# Altium PCB PCB1.PcbDoc
Units mm, origin at the board's own origin, x right, y up, seen from the top; angles counter-clockwise.
Board outline 82 x 65 mm, 2 copper layers (Top Layer, Bottom Layer); 67 components, 69 nets, 262 pads, 85 vias.
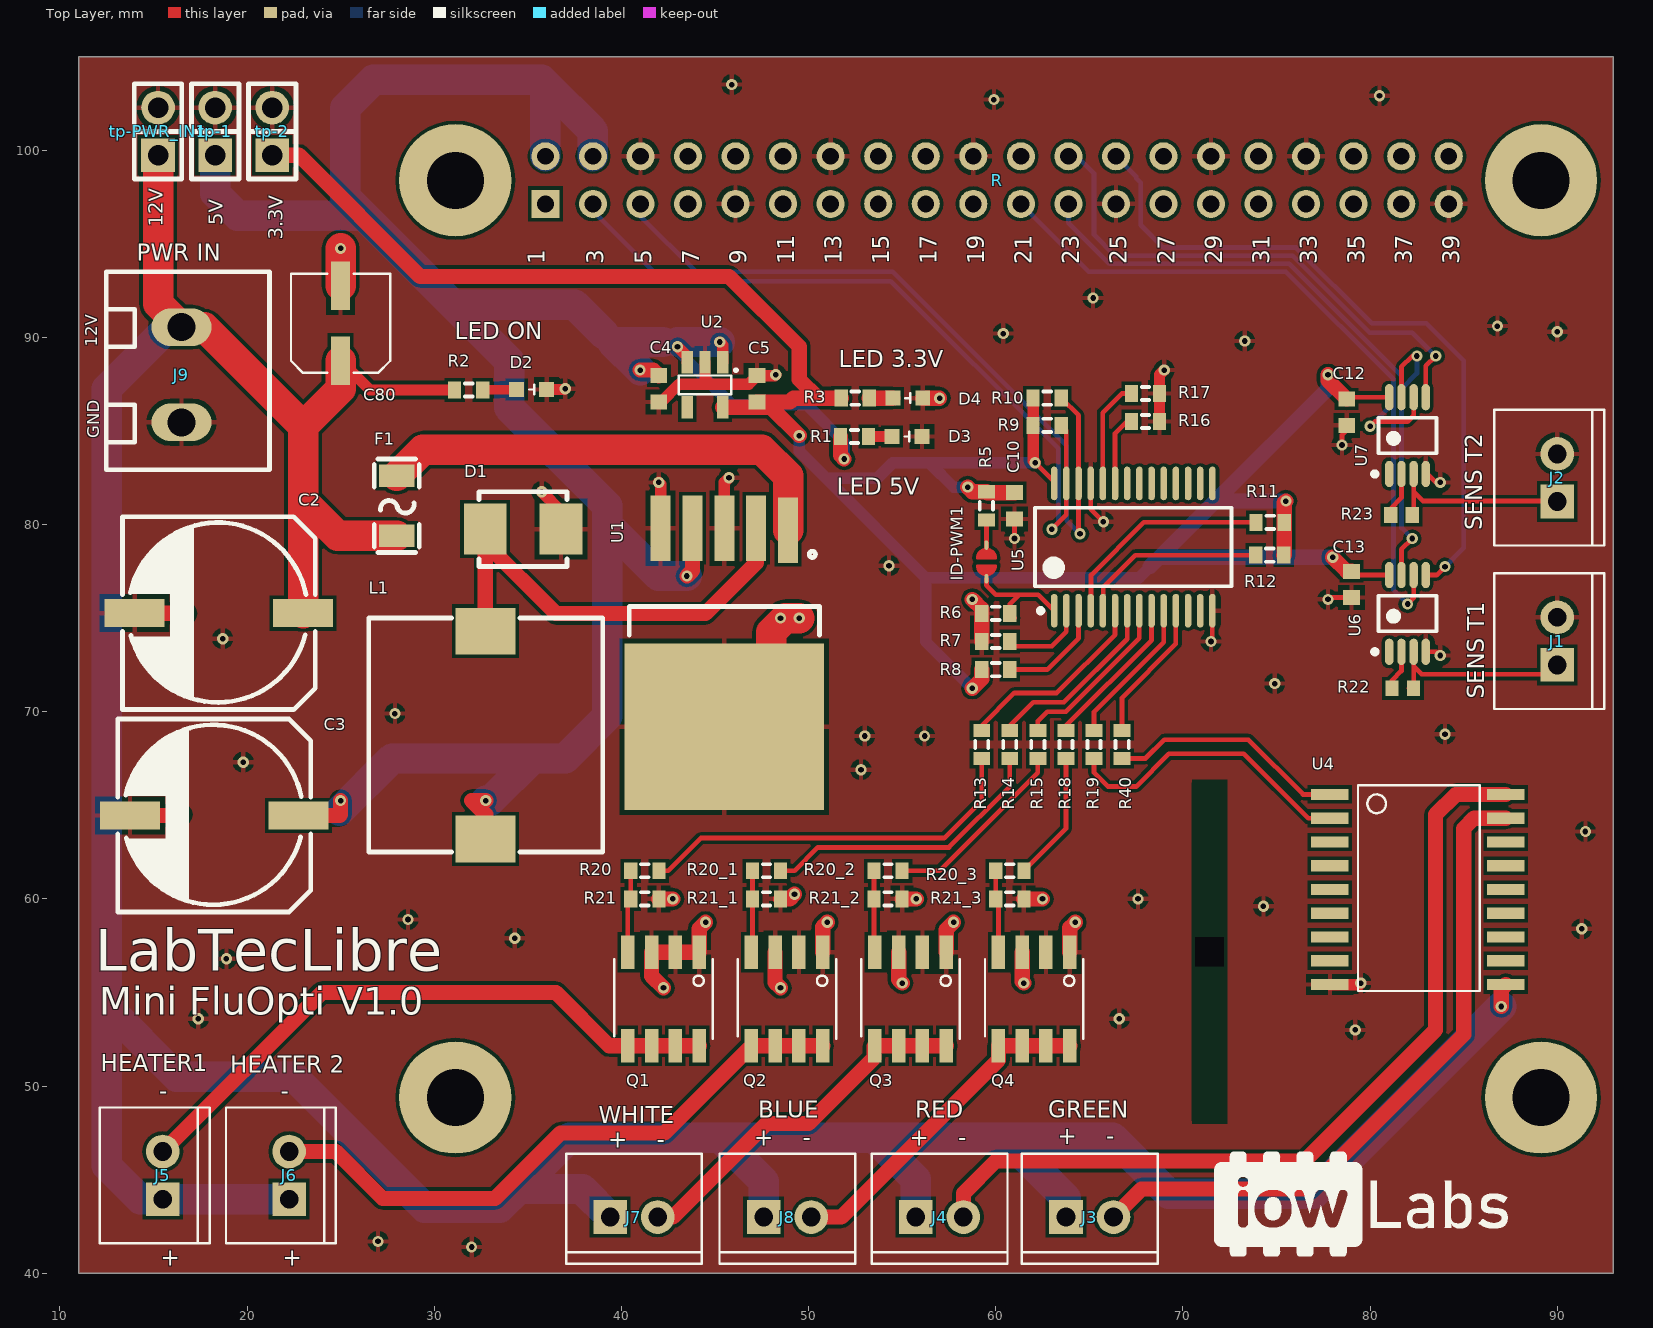
[diagram p0: Top Layer view]
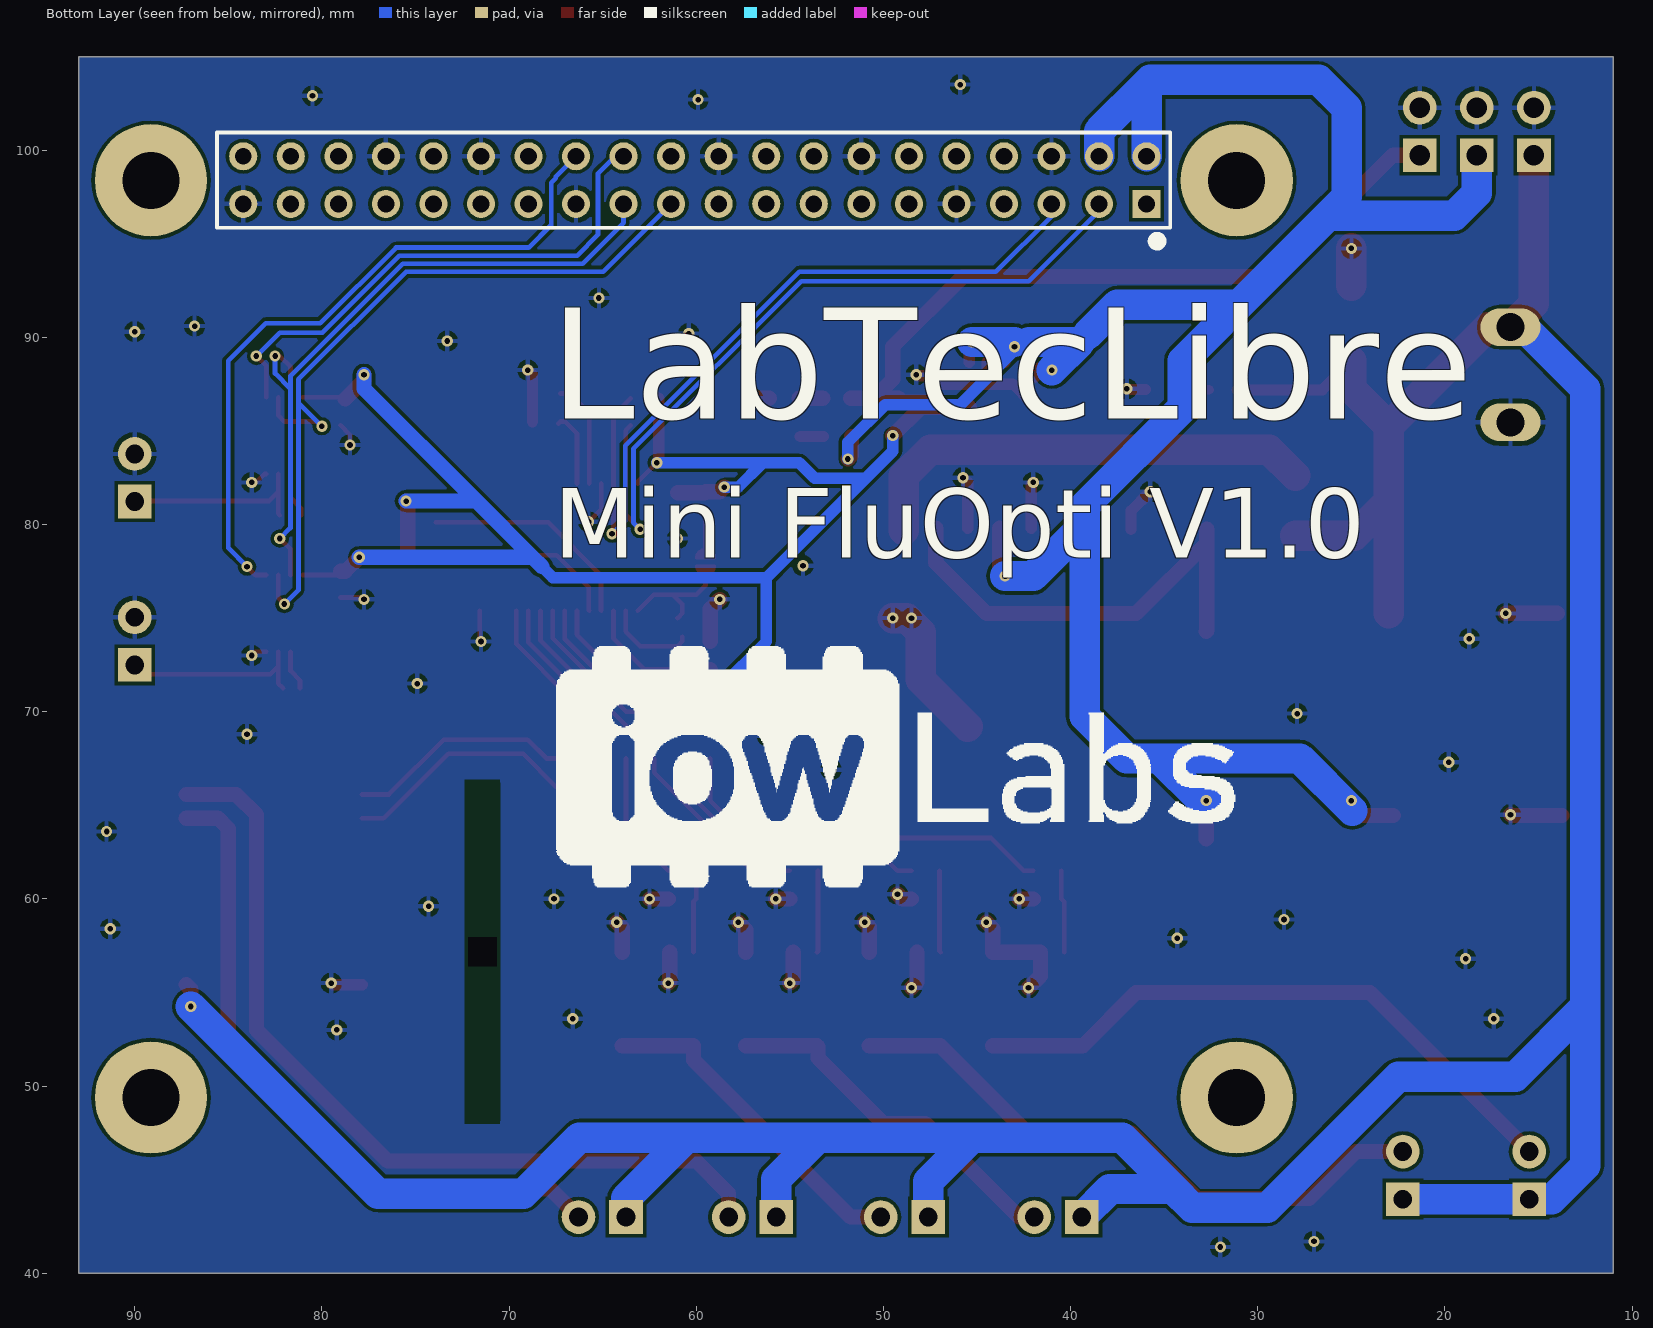
[diagram p1: Bottom Layer view, seen from below]

## Layer stack, top to bottom
Top Solder: solder mask 0.0102, Solder Resist, Dk 3.5
Top Layer: signal copper 0.0356
Dielectric 1: dielectric 0.32, FR-4, Dk 4.8
Bottom Layer: signal copper 0.0356
Bottom Solder: solder mask 0.0102, Solder Resist, Dk 3.5

## Board outline
11,40 93,40 93,105 11,105

## Design rules (kind name [scope] priority, off if disabled: settings)
Clearance [All] p1: gap=0.178 ignorepadtopadclearanceinfootprint=FALSE
PolygonConnect [All] p1: connectstyle=Relief reliefconductorwidth=0.254 reliefentries=4 polygonreliefangle="90 Angle" airgapwidth=0.254
RoutingVias [All] p1: holewidth=0.3 width=0.6 viastyle="Through Hole" minholewidth=0.3 minwidth=0.6 maxholewidth=0.3 maxwidth=0.6
SolderMaskExpansion [All] p1: expansion=0.102
Width [All] p1: maxlimit=1.626 minlimit=0.254 preferedwidth=0.61
30 further rules are at their usual default settings.

## Classes and differential pairs
component class ADC: C12 C13 J1 J2 R22 R23 T2 U6 U7
component class U_DCDC_stepdown: C2 C3 C4 C5 D1 D2 D3 D4 F1 L1 R1 R2 R3 tp-1 tp-2 U1 U2
component class Salidas: J3 J4 J5 J6 J7 J8
component class "Generador PWM": 5 C10 ID-PWM1 R5 R6 R7 R8 R9 R10 R11 R12 R13 R14 R15 R16 R17 R18 R19 R40 U5
component class Drivers: Q1 Q2 Q3 Q4 R20 R20_1 R20_2 R20_3 R21 R21_1 R21_2 R21_3 U4
component class U_Rasp: R
component class TopLevel: C80 J9 tp-PWR_IN1

## Components (designator, comment, footprint, x,y, rotation, side; value= is the part's Value field where it differs from the comment)
C2 "Cap pol" CAP_SMD_Electrolytic_10x10 18.5,75.262 r180 top value=680uF
C3 "Cap pol" CAP_SMD_Electrolytic_10x10 18.25,64.453 r180 top value=330uF
C4 "Cap Semi" 1608[0603] 42,87.25 r90 top value=1uF
C5 "Cap Semi" 1608[0603] 47.25,87.25 r270 top value=1uF
C10 "Cap Semi" 1608[0603] 61,81 r90 top value=10uF
C12 "Cap Semi" 1608[0603] 78.75,86 r90 top value=100nF
C13 "Cap Semi" 1608[0603] 79,76.8 r90 top value=100nF
C80 "Cap pol" CAP_SMD_Electrolytic_5X5.4 25,90.75 r90 top value=47uF
D1 "Schottky Diode" SMB_L4.6-W3.6-LS5.3-RD 34.75,79.75 r180 top
D2 "Generic LED" LED0603 35.21,87.211 r0 top
D3 "Generic LED" LED0603 55.256,84.7 r0 top
D4 "Generic LED" LED0603 55.3,86.75 r0 top
F1 "Generic Fuse" F1206 28,81 r90 top
ID-PWM1 "sj" SJ2 59.5,78 r270 top
J1 "Generic header 2x1" JST-2x1 90,73.77 r90 top
J2 "Generic header 2x1" JST-2x1 90,82.5 r90 top
J3 "Generic header 2x1" JST-2x1 65.02,43 r0 top
J4 "Generic header 2x1" JST-2x1 57,43 r0 top
J5 "Generic header 2x1" JST-2x1 15.5,45.23 r90 top
J6 "Generic header 2x1" JST-2x1 22.25,45.23 r90 top
J7 "Generic header 2x1" JST-2x1 40.67,43 r0 top
J8 "Generic header 2x1" JST-2x1 48.87,43 r0 top
J9 "Tblock 2x1" T_BLOCK_2P 16.5,88 r270 top
L1 "Inductor" IND-SMD_L12.5-W12.5_SMDRS1275 32.75,68.75 r270 top value=33uH
Q1 "IRF7401PbF-1" SOIC8 42.25,54.65 r180 top
Q2 "IRF7401PbF-1" SOIC8 48.849,54.65 r180 top
Q3 "IRF7401PbF-1" SOIC8 55.449,54.65 r180 top
Q4 "IRF7401PbF-1" SOIC8 62.048,54.65 r180 top
R "RPI GPIO Connector" rpi 60.071,98.4 r180 top
R1 "Res3" J1-0603 52.45,84.7 r180 top value=220
R2 "Res3" J1-0603 31.844,87.186 r180 top value=442
R3 "Res3" J1-0603 52.494,86.75 r180 top value=150
R5 "Res3" J1-0603 59.5,81 r270 top value=2K
R6 "Res3" J1-0603 60,75.25 r0 top value=10K
R7 "Res3" J1-0603 60,73.75 r0 top value=10K
R8 "Res3" J1-0603 60,72.25 r0 top value=2K
R9 "Res3" J1-0603 62.75,85.296 r0 top value=2K
R10 "Res3" J1-0603 62.75,86.75 r0 top value=2K
R11 "Res3" J1-0603 74.663,80.115 r180 top value=2K
R12 "Res3" J1-0603 74.637,78.363 r180 top value=2K
R13 "Res3" J1-0603 59.25,68.25 r90 top value=220
R14 "Res3" J1-0603 60.75,68.25 r90 top value=220
R15 "Res3" J1-0603 62.25,68.25 r90 top value=220
R16 "Res3" J1-0603 68,85.5 r180 top value=10K
R17 "Res3" J1-0603 68,87 r180 top value=10K
R18 "Res3" J1-0603 63.75,68.25 r90 top value=220
R19 "Res3" J1-0603 65.25,68.25 r90 top value=220
R20 "Res3" J1-0603 41.25,61.5 r180 top value=110
R20_1 "Res3" J1-0603 47.75,61.5 r180 top value=110
R20_2 "Res3" J1-0603 54.25,61.5 r180 top value=110
R20_3 "Res3" J1-0603 60.75,61.5 r180 top value=110
R21 "Res3" J1-0603 41.25,60 r180 top value=10K
R21_1 "Res3" J1-0603 47.75,60 r180 top value=10K
R21_2 "Res3" J1-0603 54.25,60 r180 top value=10K
R21_3 "Res3" J1-0603 60.75,60 r180 top value=10K
R22 "CRCW06033K74FKEA" RESC1609X50X30LL10T20 81.75,71.25 r180 top value=4.22k
R23 "CRCW06033K74FKEA" RESC1609X50X30LL10T20 81.675,80.5 r180 top value=4.22k
R40 "Res3" J1-0603 66.75,68.25 r90 top value=220
tp-1 "Pin Header 2x1" HDR-TH_P2.54-H-M_A2541WV-2P 18.298,101 r90 top
tp-2 "Pin Header 2x1" HDR-TH_P2.54-H-M_A2541WV-2P 21.347,101 r90 top
tp-PWR_IN1 "Pin Header 2x1" HDR-TH_P2.54-H-M_A2541WV-2P 15.25,101 r90 top
U1 "LM2596-5V" TO-263-5 45.5,74.5 r90 top
U2 "AP2112K-3.3TRG1" SOT25-5 44.469,87.461 r0 top
U4 "ULN2803A" SOIC18 77.85,65.58 r0 top
U5 "PCA9685" SSOP-28_L 67.347,78.795 r90 top
U6 "MAX6682MUA+T" MAXM-U8+1_L 82,75.25 r90 top
U7 "MAX6682MUA+T" MAXM-U8+1_L 82,84.75 r90 top

## Footprints (in the part's own frame and the unit in brackets; to place one, negate y for a bottom-side part, rotate by r counter-clockwise, add the part's x,y. Pads: shape width x height; smd on the part's side, far side on the other; paste and mask are expansions set on the pad)
1608[0603] [mm] "Chip Capacitor, Body 1.6x0.8mm, IPC High Density"
  rect 0.8x0.9 smd: 1(-0.7,0) 2(0.7,0)
  body extent -0.87,-0.48 0.87,0.48, height 1.3
CAP_SMD_Electrolytic_5X5.4 [mm]
  rect 2.6x1 smd: 1(2,0) 2(-2,0)
  silkscreen extent -2.65,-2.65 2.65,2.65, body extent -2.95,-2.76 2.95,2.76, height 5.57
CAP_SMD_Electrolytic_10x10 [mm]
  rect 3.2x1.5 smd: 1(4.5,0) 2(-4.5,0)
  silkscreen extent -5.15,-5.15 5.15,5.15, body extent -6,-5.25 6,5.25, height 10.5
F1206 [mm]
  rect 1.2x1.9 smd: 1(-1.6,0) 2(1.6,0)
  silkscreen extent -2.5,-1.2 2.5,1.2, body extent -1.7,-0.89 1.7,0.89, height 0.84
HDR-TH_P2.54-H-M_A2541WV-2P [mm]
  rect 1.8x1.8 hole 1.1: 1(-1.27,0)
  round 1.8 hole 1.1: 2(1.27,0)
  silkscreen extent -2.54,-1.27 2.54,1.27, body extent -2.46,-1.16 2.62,1.24, height 8.36
IND-SMD_L12.5-W12.5_SMDRS1275 [mm]
  rect 2.5x3.2 smd: 1(-5.55,0) 2(5.55,0)
  silkscreen extent -6.25,-6.25 6.25,6.25, body extent -6.25,-6.25 6.25,6.25, height 7.8
J1-0603 [mm] "Chip Resistor, Body 1.6x0.8mm, IPC High Density"
  rect 0.7x0.9 smd: 1(-0.75,0) 2(0.75,0)
  silkscreen extent -0.2,-0.35 0.2,0.35, body extent -0.85,-0.48 0.85,0.48, height 0.9
JST-2x1 [mm] "JST- TH-2x1-P2.5-XH"
  rect 1.8x1.8 hole 1: 1(-1.27,0)
  round 1.8 hole 1: 2(1.27,0)
  silkscreen extent -3.62,-2.5 3.62,3.37, body extent -3.61,-2.49 3.61,3.35, height 7.21
LED0603 [mm] "LED 0603"
  rect 0.8x0.8 smd: 1(-0.8,0) 2(0.8,0)
  silkscreen extent -0.13,-0.25 0.13,0.25, body extent -0.8,-0.4 0.8,0.4, height 0.4
MAXM-U8+1_L [mm] "SOP, 8-Leads, Body 3x3mm, Pitch 0.65mm, IPC High Density"
  oval 1.4x0.45 smd: 1(-2.05,0.975) 2(-2.05,0.325) 3(-2.05,-0.325) 4(-2.05,-0.975) 5(2.05,-0.975) 6(2.05,-0.325) 7(2.05,0.325) 8(2.05,0.975)
  silkscreen extent -2.17,-1.55 0.95,1.87, body extent -1.55,-1.55 1.55,1.55, height 1.1
RESC1609X50X30LL10T20 [mm] "Chip Resistor, 2-Leads, Body 1.55x0.85mm, IPC High Density"
  rect 0.7x0.85 smd: 1(-0.575,0) 2(0.575,0)
  body extent -0.82,-0.48 0.82,0.48, height 0.5
rpi [mm]
  rect 1.5x1.5 hole 0.9: 1(24.13,1.27)
  round 1.5 hole 0.9: 2(24.13,-1.27) 3(21.59,1.27) 4(21.59,-1.27) 5(19.05,1.27) 6(19.05,-1.27) 7(16.51,1.27) 8(16.51,-1.27) 9(13.97,1.27) 10(13.97,-1.27) 11(11.43,1.27) 12(11.43,-1.27) 13(8.89,1.27) 14(8.89,-1.27) 15(6.35,1.27) 16(6.35,-1.27) 17(3.81,1.27) 18(3.81,-1.27) 19(1.27,1.27) 20(1.27,-1.27) 21(-1.27,1.27) 22(-1.27,-1.27) 23(-3.81,1.27) 24(-3.81,-1.27) 25(-6.35,1.27) 26(-6.35,-1.27) 27(-8.89,1.27) 28(-8.89,-1.27) 29(-11.43,1.27) 30(-11.43,-1.27) 31(-13.97,1.27) 32(-13.97,-1.27) 33(-16.51,1.27) 34(-16.51,-1.27) 35(-19.05,1.27) 36(-19.05,-1.27) 37(-21.59,1.27) 38(-21.59,-1.27) 39(-24.13,1.27) 40(-24.13,-1.27)
  body extent -25.52,-2.63 25.53,2.38, height 8.5
SJ2 [mm]
  oval 0.5x0.2 smd: 1(-0.9,0) 2(0.9,0)
  Top Layer region: 0.2,-0.5 0.417,-0.45 0.591,-0.312 0.687,-0.111 0.687,0.111 0.591,0.312 0.417,0.45 0.2,0.5 0.2,0.5
  Top Layer region: -0.238,-0.491 -0.455,-0.442 -0.629,-0.303 -0.726,-0.103 -0.726,0.12 -0.629,0.32 -0.455,0.459 -0.238,0.509 -0.238,0.509
  Top Layer lines w0.127: 0.2,-0.5 ccw(c0.2,0) 0.699,-0.025 ccw(c0.2,0) 0.2,0.5 0.2,-0.5 ; -0.2,-0.5 cw(c-0.2,0) -0.699,-0.025 cw(c-0.2,0) -0.2,0.5 -0.2,-0.5
SMB_L4.6-W3.6-LS5.3-RD [mm]
  rect 2.29x2.72 smd: 1(-2.025,0) 2(2.025,0)
  silkscreen extent -2.35,-2 2.35,2, body extent -2.79,-1.97 2.8,1.97, height 2.5
SOIC8 [mm]
  rect 0.72x1.8 smd: 1(-1.905,-2.5) 2(-0.635,-2.5) 3(0.635,-2.5) 4(1.905,-2.5) 5(1.905,2.5) 6(0.635,2.5) 7(-0.635,2.5) 8(-1.905,2.5)
  silkscreen extent -2.62,-2.13 2.62,2.13, body extent -2.5,-3.08 2.5,3.08, height 2
SOIC18 [mm]
  rect 2x0.6 smd: 1(0,0) 2(0,-1.27) 3(0,-2.54) 4(0,-3.81) 5(0,-5.08) 6(0,-6.35) 7(0,-7.62) 8(0,-8.89) 9(0,-10.16) 10(9.4,-10.16) 11(9.4,-8.89) 12(9.4,-7.62) 13(9.4,-6.35) 14(9.4,-5.08) 15(9.4,-3.81) 16(9.4,-2.54) 17(9.4,-1.27) 18(9.4,0)
  silkscreen extent 1.5,-10.5 8,0.5, body extent -0.48,-10.88 9.83,0.68, height 2.64
SOT25-5 [mm]
  rect 0.6x1.2 smd: 1(0.95,1.2) 2(0,1.2) 3(-0.95,1.2) 4(-0.95,-1.2) 5(0.95,-1.2)
  silkscreen extent -1.4,-0.5 1.68,0.81, body extent -1.55,-1.47 1.55,1.53, height 1.45
SSOP-28_L [mm] "SOP, 28-Leads, Body 10.2x5.3mm, Pitch 0.65mm, IPC High Density"
  oval 1.8x0.35 smd: 1(-3.4,4.225) 2(-3.4,3.575) 3(-3.4,2.925) 4(-3.4,2.275) 5(-3.4,1.625) 6(-3.4,0.975) 7(-3.4,0.325) 8(-3.4,-0.325) 9(-3.4,-0.975) 10(-3.4,-1.625) 11(-3.4,-2.275) 12(-3.4,-2.925) 13(-3.4,-3.575) 14(-3.4,-4.225) 15(3.4,-4.225) 16(3.4,-3.575) 17(3.4,-2.925) 18(3.4,-2.275) 19(3.4,-1.625) 20(3.4,-0.975) 21(3.4,-0.325) 22(3.4,0.325) 23(3.4,0.975) 24(3.4,1.625) 25(3.4,2.275) 26(3.4,2.925) 27(3.4,3.575) 28(3.4,4.225)
  silkscreen extent -3.52,-5.25 2.1,5.25, body extent -2.8,-5.25 2.8,5.25, height 2
T_BLOCK_2P [mm] "PITCH 5.0, 3 POS"
  oval 2x3.2 hole 1.5: 1(-2.54,0) 2(2.54,0)
  silkscreen extent -5.5,-4.01 5.08,4.7, body extent -5.6,-2.9 5,4.7, height 10
TO-263-5 [mm]
  rect 3.5x1.069 smd: 1(5.2,-3.404) 2(5.3,-1.702) 3(5.3,0) 4(5.3,1.702) 5(5.3,3.404)
  rect 8.89x10.66 smd: 6(-5.3,0)
  silkscreen extent -0.41,-5.08 4.07,5.08, body extent -8.55,-5.1 5.8,5.08, height 4.58

## Part data
C2: "Electrolytic Aluminium Capacitor", Manufacturer=PANASONIC, Manufacturer Part Number=EEEFK1V681AQ, Package=SMD,12.5x13.5mm, Supplier Part Number 1=C178568, Voltage=35V, Supplier 1=LCSC
C3: "Electrolytic Aluminium Capacitor", Manufacturer=PANASONIC, Manufacturer Part Number=EEE1VA331UAP, Package="SMD, 10X10mm", Supplier Part Number 1=C249650, Voltage=35V, Supplier 1=LCSC
C4 C5: "Capacitor (Semiconductor SIM Model)", Manufacturer="Samsung Electro-Mechanics", Manufacturer Part Number=CL10B105KO8NNNC, Supplier Part Number 1=C59782, LatestRevisionDate=29-May-2009, LatestRevisionNote="IPC-7351 Footprint Added.", PackageDescription="Chip Capacitor", PackageReference=C0603, Published=8-Jun-2000, Publisher="Altium Limited", Supplier 1=LCSC
C10: "Capacitor (Semiconductor SIM Model)", Manufacturer="Samsung Electro-Mechanics", Manufacturer Part Number=CL10A106MQ8NNNC, Supplier Part Number 1=C92487, LatestRevisionDate=29-May-2009, LatestRevisionNote="IPC-7351 Footprint Added.", PackageDescription="Chip Capacitor", PackageReference=C1206, Published=8-Jun-2000, Publisher="Altium Limited", Supplier 1=LCSC
C12 C13: "Capacitor (Semiconductor SIM Model)", Manufacturer="Taiyo Yuden", Manufacturer Part Number=UMK107B104KAHT, Supplier Part Number 1=C66501, LatestRevisionDate=29-May-2009, LatestRevisionNote="IPC-7351 Footprint Added.", PackageDescription="Chip Capacitor", PackageReference=C0603, Published=8-Jun-2000, Publisher="Altium Limited", Supplier 1=LCSC
C80: "Electrolytic Aluminium Capacitor", Supplier 1=LCSC
D1: "Schottky Diodes", Manufacturer="MCC(Micro Commercial Components)", Manufacturer Part Number=SK32B-LTP, Package=SMB, Reverse voltage=20V, Supplier Part Number 1=C180191, Supplier 1=LCSC
D2 D3 D4: library part LED, "Generic LED SMD", Color=Green, Package=0603, Supplier Part Number 1=C72043, Supplier 1=LCSC
F1: library part FUSE, "SMD Fuse", Current Rating=4.5A, Manufacturer=AEM, Manufacturer Part Number=F1206VH4500TM, Package=1206, Rated Voltage AC=65V, Supplier Part Number 1=C310980, Supplier 1=LCSC
ID-PWM1: library part Jumper, "solder jumper generic"
J1 J2 J3 J4 J5 J6 J7 J8: library part "Header - 2x1", "Generic Header 2pos, 1 row, 2.54 pitch", Manufacturer="CJT(Changjiang Connectors)", Manufacturer Part Number=A2547WV-2P, Package="Through Hole,P=2.54mm", Supplier Part Number 1=C20079, Pitch=2.54mm, Supplier 1=LCSC
J9: library part "Header - 2x1b", "Screw terminal 2pos, 1 row, 5pitch", Manufacturer="CJT(Changjiang Connectors)", Manufacturer Part Number=A2547WV-2P, Package="Through Hole,P=2.54mm", Supplier Part Number 1=C8404, Pitch=2.54mm, Supplier 1=LCSC
L1: "Inductor SMD", Manufacturer=GLE, Manufacturer Part Number=GCRH127M-330MC, Package=SMD,12.3x12.3x8mm, Supplier Part Number 1=C439422, Supplier 1=LCSC
Q1 Q2 Q3 Q4: library part IRF7401, "MOSFET N Channel 20V 8.7A 700mV @ 250uA 22mO @ 4.1A,4.5V SOIC-8_150mil RoHS", Manufacturer="Infineon Technologies", Manufacturer Part Number=IRF7401TRPBF, Package=SO-8, Supplier Part Number 1=C169089, Supplier 1=LCSC
R: library part "rpi connector", "GPIO Header for Raspberry Pi A+/B+/Pi 2/Pi 3 - 2x20", Manufacturer="SparkFun Electronics", Manufacturer Part Number=PRT-14017, Supplier Part Number 1=1568-1462-ND, Accessory Type=Connector, Category="Development Boards, Kits, Programmers", ComponentLink1Description=https://cdn.sparkfun.com/datasheets/Dev/RaspberryPi/12313.pdf, ComponentLink1URL=https://cdn.sparkfun.com/datasheets/Dev/RaspberryPi/12313.pdf, For Use With/Related Products="Raspberry Pi", Nils Minor=author, nilsminor@web.de=mail, Part Status=Active, Pricing 1="1=1.84 (EUR)", RoHS="RoHS Compliant", Stock 1=150, Supplier 1=LCSC
R1: "±1% ±100ppm/? 0.1W 220O 0603 Chip Resistor - Surface Mount ROHS", Manufacturer=YAGEO, Manufacturer Part Number=AC0603FR-07442RL, Supplier Part Number 1=C304718, LatestRevisionDate=29-May-2009, LatestRevisionNote="IPC-7351 Footprint Added.", PackageDescription="Chip Resistor", PackageReference=J1-0603, Published=8-Jun-2000, Publisher="Altium Limited", Supplier 1=LCSC
R2: "Resistor", Manufacturer=YAGEO, Manufacturer Part Number=AC0603FR-07442RL, Supplier Part Number 1=C23057, LatestRevisionDate=29-May-2009, LatestRevisionNote="IPC-7351 Footprint Added.", PackageDescription="Chip Resistor", PackageReference=J1-0603, Published=8-Jun-2000, Publisher="Altium Limited", Supplier 1=LCSC
R3: "Resistor", Manufacturer=YAGEO, Manufacturer Part Number=AC0603FR-07442RL, Supplier Part Number 1=C114608, LatestRevisionDate=29-May-2009, LatestRevisionNote="IPC-7351 Footprint Added.", PackageDescription="Chip Resistor", PackageReference=J1-0603, Published=8-Jun-2000, Publisher="Altium Limited", Supplier 1=LCSC
R5 R8 R9 R10 R11 R12: "Resistor", Manufacturer=YAGEO, Manufacturer Part Number=RC0603FR-072KL, Supplier Part Number 1=C105576, LatestRevisionDate=29-May-2009, LatestRevisionNote="IPC-7351 Footprint Added.", PackageDescription="Chip Resistor", PackageReference=J1-0603, Published=8-Jun-2000, Publisher="Altium Limited", Supplier 1=LCSC
R6 R7 R16 R17: "Resistor", Manufacturer=PANASONIC, Manufacturer Part Number=ERJPA3F1002V, Supplier Part Number 1=C441927, LatestRevisionDate=29-May-2009, LatestRevisionNote="IPC-7351 Footprint Added.", PackageDescription="Chip Resistor", PackageReference=J1-0603, Published=8-Jun-2000, Publisher="Altium Limited", Supplier 1=LCSC
R13 R14 R15 R18 R19 R40: "Resistor", Manufacturer=YAGEO, Manufacturer Part Number=RC0603FR-07220RL, Supplier Part Number 1=C304718, LatestRevisionDate=29-May-2009, LatestRevisionNote="IPC-7351 Footprint Added.", PackageDescription="Chip Resistor", PackageReference=J1-0603, Published=8-Jun-2000, Publisher="Altium Limited", Supplier 1=LCSC
R20 R20_1 R20_2 R20_3: "Resistor", Manufacturer="ROHM Semicon", Manufacturer Part Number=MCR03EZPFX1100, Supplier Part Number 1=C22781, LatestRevisionDate=29-May-2009, LatestRevisionNote="IPC-7351 Footprint Added.", PackageDescription="Chip Resistor", PackageReference=J1-0603, Published=8-Jun-2000, Publisher="Altium Limited", Supplier 1=LCSC
R21 R21_1 R21_2 R21_3: "Resistor", Manufacturer=PANASONIC, Manufacturer Part Number=ERJPA3F1002V, Supplier Part Number 1=C25804, LatestRevisionDate=29-May-2009, LatestRevisionNote="IPC-7351 Footprint Added.", PackageDescription="Chip Resistor", PackageReference=J1-0603, Published=8-Jun-2000, Publisher="Altium Limited", Supplier 1=LCSC
R22 R23: library part CMP-2000-03309-1, Manufacturer="Vishay Dale", Supplier Part Number 1=C170595, Part Number=CRCW06033K74FKEA, Supplier 1=LCSC
tp-1 tp-2 tp-PWR_IN1: library part "Header - 2x1c", "Pin Header 2pos, 1 row, 2.54 pitch", Manufacturer="CJT(Changjiang Connectors)", Manufacturer Part Number=A2541WV-2P, Supplier Part Number 1=C492401, Pitch=2.54, Supplier 1=LCSC
U1: "Step-Down Positive Fixed 1 3A 150kHz TO-263-5 DC-DC Converters RoHS", Manufacturer="HTC Korea TAEJIN Tech", Manufacturer Part Number=LM2596R-5.0, Package=TO-263-5, Supplier Part Number 1=C77782, Supplier 1=LCSC
U2: library part AP2112K-3.3, "600mA CMOS LDO REGULATOR WITH ENABLE", Manufacturer=DIODES, Package=SOT-25-5_L3.0-W1.8-P0.95-LS3.0-BL, Supplier Part Number 1=C150742, Manufacturer Part Number=AP2112K-3.3TRG1, Supplier 1=LCSC
U4: library part ULN2803, "Darlington transistor array driver SOIC-18_300mi", Manufacturer="Texas instrument", Manufacturer Part Number=ULN2803ADWR, Package=SOIC-18_300mil, Supplier Part Number 1=C33924, Supplier 1=LCSC
U5: "LED Drivers,16CH, I2C, TSSOP-28", Manufacturer="NXP Semicon", Manufacturer Part Number=PCA9685PW/Q900,118, Package=TSSOP-28, Supplier Part Number 1=C92206, Supplier 1=LCSC
U6 U7: library part CMP-0253-01037-1, "Thermistor-to-Digital Converter, 10 Bits Temperature Resolution, -55 to 125 degC, 8-Pin SOP (U8+1), Pb-Free, Tape and Reel", Generic Part Number=MAX6682, Supplier Part Number 1=C2653145, Code_JEDEC=MO-187, ComponentLink1Description="Manufacturer URL", ComponentLink1URL=http://www.maximintegrated.com/, ComponentLink2Description=Datasheet, ComponentLink2URL=http://datasheets.maximintegrated.com/en/ds/MAX6682.pdf, ComponentLink3Description="Package Specification", ComponentLink3URL=http://pdfserv.maximintegrated.com/package_dwgs/21-0036.PDF, DatasheetVersion="Rev. 0", Functions="Thermistor-to-Digital Converter", Interface=3-Wire/SPI, Mounting Technology="Surface Mount", PackageDescription="8-Pin Micro-MAX, Thin Shrink Small-Outline (U8+1), Body 3 x 3 mm, Pitch 0.65 mm", PackageReference=U8+1, PackageVersion="Rev. L, 08/2009", Packing="Tape and Reel", Parasite Pwr.=No, PartNumber=MAX6682MUA+T, Supplier 1=LCSC

## Free pads (board coordinates)
  rect 1.524x1.524 hole 1.524 square unplated: 7(71.425,57.175)
  round 6 hole 3.048: ""(31.13,49.388) ""(31.13,98.388) ""(89.13,49.388) ""(89.13,98.388)

## Via types
v1: diameter 0.6, hole 0.3, Top Layer to Bottom Layer, 85 vias

## Nets (pads, with @x,y where several pads share a name; then routed paths per layer and width w, separated by ;. In a path a pad name is that pad's centre, name@x,y a point inside that pad or via, vN(x,y) a via of type N, cw(c..) or ccw(c..) an arc to the next point about the centre after c; other vN are vias at no path point)
+3V3: C5.2 C10.2 C12.2 C13.2 R3.2 R5.1 R8.1 R9.1 R10.1 R11.1 R12.1 tp-2.1 U2.5 U5.28 U6.8 U7.8 | length 135
  Top Layer w0.254: v1(62.1,83.3) 63.122,82.278 U5.28 ; C13.2 79.2,77.3 U6.8 ; C12.2@79,86.7 79.1,86.8 U7.8
  Top Layer w0.61: R10.1 R9.1 62,83.4 v1(62.1,83.3)
  Top Layer w0.813: tp-2.1 22.77,99.73 29.25,93.25 45.75,93.25 49.5,89.5 49.5,87.75 50.5,86.75 ; U2.5 C5.2@46.961,86.261 ; v1(49.5,84.75) 47.989,86.261 C5.2@46.961,86.261 ; R3.2 50.5,86.75 ; v1(58.5,82) 58.75,81.75 R5.1 59.55,81.7 C10.2 ; v1(58.75,71.25) 59.25,71.75 R8.1 ; R12.1 75.413,78.388 R11.1 75.413,81.163 v1(75.5,81.25) ; v1(77.75,88) 77.75,87.7 C12.2 ; v1(78,78.25) 78.75,77.5 C13.2 ; C5.2@46.961,86.261 C5.2 49,86.55 49.2,86.75 50.5,86.75
  Bottom Layer w0.61: v1(49.5,84.75) 49.5,83.908 50.941,82.466 ; 56.5,83.25 57.75,82 v1(58.5,82) ; v1(58.75,71.25) 56.25,73.75 56.25,77.158 ; v1(62.1,83.3) 54.5,83.3 53.666,82.466 50.941,82.466 ; 68.25,77.75 67.658,77.158 56.25,77.158 ; 50.941,82.466 56.25,77.158
  Bottom Layer w0.813: 68.25,77.75 68.75,78.25 ; v1(75.5,81.25) 71.75,81.25 ; v1(77.75,88) 77.75,87.25 71.75,81.25 ; v1(78,78.25) 68.75,78.25 ; 68.75,78.25 71.75,81.25
+5V: C3.2 C4.2 L1.2 R1.2 R.2 R.4 tp-1.1 U1.4 U2.1 U2.3 | length 136.8
  Top Layer w0.61: v1(43,89.5) 43.519,88.981 U2.3 ; v1(45.25,89.75) 45.419,89.581 U2.1
  Top Layer w0.813: C3.2 24.953,64.453 25,64.5 v1(25,65.25) ; L1.2 32.75,64.5 32,65.25 v1(32.75,65.25) ; v1(41,88.25) 41.7,88.25 C4.2 ; v1(43.5,77.25) 43.798,77.548 U1.4 ; R1.2 51.7,83.7 v1(51.9,83.5)
  Bottom Layer w0.61: 42.2,89.75 42.55,89.75 45.9,86.4 49.9,86.4 51.9,84.4 v1(51.9,83.5)
  Bottom Layer w0.813: 39.125,90.125 39.5,89.75
  Bottom Layer w1.626: tp-1.1 18.298,97.702 19.5,96.5 26.25,96.5 ; 24.953,64.703 27.75,67.5 35.25,67.5 ; v1(32.75,65.25) 33,65.25 35.25,67.5 ; R.2 35.941,103.559 ; R.4 38.481,101.019 35.941,103.559 ; 39.125,90.125 37.5,91.75 31,91.75 ; v1(41,88.25) 39.5,89.75 42.2,89.75 ; v1@43,89.75 v1(45.25,89.75) ; v1(43.5,77.25) 42,77.25 39.25,80 ; 26.25,96.5 25.25,97.5 25.25,102.25 26.75,103.75 35.75,103.75 35.941,103.559 ; 26.25,96.5 31,91.75 ; 31,91.75 34,88.75 34,86.25 39.25,81 39.25,80 ; 35.25,67.5 37,67.5 39.25,69.75 39.25,80
addr_pca9685_a0: ID-PWM1.2 R6.2 U5.1 | length 6.1
  Top Layer w0.254: ID-PWM1.2 59.5,76.75 60,76.25 61.25,76.25 ; R6.2@61,75 R6.2 60.75,75.75 61.25,76.25 ; U5.1 62.267,76.25 61.25,76.25
CH_0_aux: J4.2 U4.18 | length 45.8
  Top Layer w0.813: J4.2 58.27,44.27 60,46 76.5,46 83.5,53 83.5,64.5 84.58,65.58 U4.18
CH_1_aux: J3.2 U4.17 | length 36.2
  Top Layer w0.813: J3.2 67.79,44.5 76.75,44.5 85,52.75 85,63.75 85.56,64.31 U4.17
CH_2_aux: J5.2 Q1.5 Q1.6 Q1.7 Q1.8 | length 33.4
  Top Layer w0.813: J5.2 24,55 36.5,55 39.35,52.15 Q1.5 Q1.6 Q1.7 Q1.8
CH_3_aux: J6.2 Q2.5 Q2.6 Q2.7 Q2.8 | length 32.9
  Top Layer w0.813: J6.2 24.75,46.5 27.25,44 33.25,44 36.75,47.5 42.294,47.5 Q2.5 Q2.6 Q2.7 Q2.8
CH_4_aux: J7.2 Q3.5 Q3.6 Q3.7 Q3.8 | length 19.6
  Top Layer w0.813: J7.2 42.75,43 47.75,48 50,48 53.5,51.5 53.5,52.106 Q3.5 Q3.6 Q3.7 Q3.8
CH_5_aux: J8.2 Q4.5 Q4.6 Q4.7 Q4.8 | length 18
  Top Layer w0.813: J8.2 51.75,43 60.143,51.393 Q4.5 Q4.6 Q4.7 Q4.8
CS1: R.26 U6.5 | length 37.1
  Top Layer w0.254: U6.5 83.55,77.3 v1(84,77.75)
  Bottom Layer w0.254: R.26 67.5,98.591 67.5,98.5 67.75,98.25 67.75,96 68.955,94.795 76.037,94.795 80.082,90.75 83,90.75 85,88.75 85,78.75 v1(84,77.75)
CS2: R.24 U7.5 | length 28.4
  Top Layer w0.254: U7.5 82.975,88.475 v1(83.5,89)
  Bottom Layer w0.254: R.24 64.33,99.67 65.25,98.75 65.25,95.477 66.364,94.364 75.858,94.364 79.971,90.25 82.25,90.25 v1(83.5,89)
GND: C2.1 C3.1 C4.1 C5.1 C10.1 C12.1 C13.1 C80.1 D1.1 D2.2 D3.2 D4.2 J1.2 J2.2 J9.2 Q1.1 Q1.2 Q1.3 Q2.1 Q2.2 Q2.3 Q3.1 Q3.2 Q3.3 Q4.1 Q4.2 Q4.3 R6.1 R7.1 R16.1 R17.1 R21.1 R21_1.1 R21_2.1 R21_3.1 R.6 R.9 R.14 R.20 R.25 R.30 R.34 R.39 tp-1.2 tp-2.2 tp-PWR_IN1.2 U1.3 U1.5 U1.6 U2.2 U4.9 U5.14 U5.25 U6.4 U7.4 | length 70
  Top Layer w0.254: v1(61,79.25) C10.1 ; U5.25 65.072,80.822 v1(65.75,80.145) ; v1(71.5,73.75) 71.572,73.822 U5.14 ; v1(77.75,76) 77.85,76.1 C13.1 ; v1(78.5,84.25) 78.5,84.8 C12.1@79,85.3 ; U6.4 83.55,73.2 v1(83.75,73) ; U7.4 83.05,82.7 83.5,82.25 v1(83.75,82.25)
  Top Layer w0.61: v1(35.75,81.75) 36.775,80.725 D1.1 ; D2.2 36.961,87.211 v1(37,87.25) ; v1(42,82.25) 42.096,82.154 U1.5 ; C4.1 42.133,86.55 43.082,87.5 44.75,87.5 ; U2.2 44.469,87.781 44.75,87.5 ; U1.3 45.5,82.25 v1(45.75,82.5) ; v1(48.25,88) 48.2,87.95 C5.1 46.8,87.5 44.75,87.5 ; R16.1 R17.1 68.75,88 v1(69,88.25) ; U4.9 79.42,55.42 v1(79.5,55.5)
  Top Layer w0.813: C3.1 16.453,64.453 v1(16.5,64.5) ; C2.1 16.738,75.262 v1(16.75,75.25) ; R21.1 v1(42.75,60) ; v1(42.25,55.25) 41.615,55.885 Q1.3 Q1.2 Q1.1 44.155,58.405 v1(44.5,58.75) ; Q2.3 48.214,55.536 v1(48.5,55.25) ; R21_1.1 49,60 v1(49.25,60.25) ; Q2.1 50.754,58.504 v1(51,58.75) ; Q3.3 54.814,55.686 v1(55,55.5) ; R21_2.1 v1(55.75,60) ; D4.2 v1(57,86.75) ; Q3.1 57.354,58.354 v1(57.75,58.75) ; v1(58.75,76) 59.25,75.5 R6.1 R7.1 ; Q4.3 61.413,55.587 v1(61.5,55.5) ; R21_3.1 v1(62.5,60) ; Q4.1 63.953,58.453 v1(64.25,58.75)
  Top Layer w1.626: C80.1 v1(25,94.75) ; U1.6 48,71.7 48,74.25 48.75,75 v1(49.5,75)
  other v1: 32,41.4 27,41.7 79.2,53 17.4,53.6 66.6,53.6 18.9,56.8 34.3,57.9 91.3,58.4 28.6,58.9 74.3,59.6 67.6,60 91.5,63.6 52.8,66.9 19.8,67.3 53,68.7 56.2,68.7 84,68.8 27.9,69.9 74.9,71.5 18.7,73.9 48.5,75 54.3,77.8 73.3,89.8 60.4,90.2 90,90.3 86.8,90.6 65.2,92.1 59.9,102.7 80.5,102.9 45.9,103.5
NetD1_2: D1.2 L1.1 U1.2 | length 24.5
  Top Layer w0.813: D1.2 D1.2@32.725,79.025 ; L1.1 32.725,74.325 D1.2@32.725,79.025 ; U1.2 47.202,77.952 44.5,75.25 36.5,75.25 D1.2@32.725,79.025
NetD2_1: D2.1 R2.1 | length 1.8
  Top Layer w0.508: R2.1 33.47,87.186 33.495,87.211 D2.1
NetD3_1: D3.1 R1.1 | length 1.3
  Top Layer w0.61: R1.1 D3.1
NetD4_1: D4.1 R3.1 | length 1.3
  Top Layer w0.813: R3.1 D4.1
NetF1_2: F1.2 U1.1 | length 25
  Top Layer w1.626: F1.2 29.4,84 47.5,84 48.904,82.596 U1.1
NetID-PWM1_1: ID-PWM1.1 R5.2 | length 1.6
  Top Layer w0.254: ID-PWM1.1@59.475,78.699 59.5,78.725 ID-PWM1.1 R5.2
NetQ1_4: Q1.4 R20.2 R21.2 | length 4.4
  Top Layer w0.254: Q1.4 40.345,59.845 R21.2 R20.2
NetQ2_4: Q2.4 R20_1.2 R21_1.2 | length 4.4
  Top Layer w0.254: Q2.4 47,57.206 R21_1.2 R20_1.2
NetQ3_4: Q3.4 R20_2.2 R21_2.2 | length 7.2
  Top Layer w0.254: R20_2.2 R21_2.2 ; Q3.4 Q3.4@53.5,57.194 ; Q3.4@53.5,57.194 R21_2.2 ; Q3.4@53.5,57.194 R21_2.2
NetQ4_4: Q4.4 R20_3.2 R21_3.2 | length 4.4
  Top Layer w0.254: R20_3.2 R21_3.2 60.143,59.857 Q4.4
NetR7_2: R7.2 U5.2 | length 4.8
  Top Layer w0.254: R7.2@60.75,74 R7.2 61,73.5 63,73.5 63.772,74.272 U5.2
NetR8_2: R8.2 U5.3 | length 6
  Top Layer w0.254: R8.2@60.75,72.546 61.046,72.25 62.75,72.25 64.422,73.922 U5.3
NetR11_2: R11.2 U5.4 | length 11.9
  Top Layer w0.254: U5.4 65.091,75.413 65.091,77.3 67.906,80.115 R11.2
NetR12_2: R12.2 U5.5 | length 10.1
  Top Layer w0.254: U5.5 65.741,75.413 65.741,76.655 67.449,78.363 R12.2
NetR13_2: R13.2 U5.6 | length 10.7
  Top Layer w0.254: R13.2 59.25,69.25 61,71 63.25,71 66.372,74.122 U5.6
NetR14_2: R14.2 U5.7 | length 10
  Top Layer w0.254: R14.2 60.75,69.25 62,70.5 63.639,70.5 67.022,73.883 U5.7
NetR15_2: R15.2 U5.8 | length 9.2
  Top Layer w0.254: R15.2 62.25,69.5 62.75,70 63.75,70 67.672,73.922 U5.8
NetR16_2: R16.2 U5.23 | length 4
  Top Layer w0.254: U5.23 66.372,84.872 67,85.5 R16.2 R16.2@67.372,85.378
NetR17_2: R17.2 U5.24 | length 5.7
  Top Layer w0.254: U5.24 65.722,85.972 66.75,87 R17.2
NetR18_2: R18.2 U5.9 | length 8.3
  Top Layer w0.254: R18.2 63.75,69.25 68.322,73.822 U5.9
NetR19_2: R19.2 U5.10 | length 7.9
  Top Layer w0.254: R19.2 65.25,70 68.972,73.722 U5.10
NetR22_2: R22.2 U6.2 | length 2.2
  Top Layer w0.254: R22.2 81.175,71.675 81.675,72.175 U6.2
NetR23_2: R23.2 U7.2 | length 2.4
  Top Layer w0.254: R23.2 81.1,80.85 81.675,81.425 U7.2
NetR40_2: R40.2 U5.11 | length 7.6
  Top Layer w0.254: R40.2 66.75,70.75 69.622,73.622 U5.11
NetR_7: R.7
NetR_8: R.8
NetR_10: R.10
NetR_11: R.11
NetR_12: R.12
NetR_13: R.13
NetR_15: R.15
NetR_16: R.16
NetR_18: R.18
NetR_19: R.19
NetR_22: R.22
NetR_29: R.29
NetR_31: R.31
NetR_32: R.32
NetR_33: R.33
NetR_35: R.35
NetR_36: R.36
NetR_37: R.37
NetR_38: R.38
NetR_40: R.40
PWM_0_in: R13.1 R20.1 | length 21.1
  Top Layer w0.254: R20.1 42.5,61.5 44.25,63.25 57.25,63.25 59.25,65.25 R13.1
PWM_1_in: R14.1 R20_1.1 | length 15.6
  Top Layer w0.254: R20_1.1 49.25,61.5 50.5,62.75 57.5,62.75 60.75,66 R14.1
PWM_2_in: R15.1 R20_2.1 | length 10.2
  Top Layer w0.254: R20_2.1 57,61.5 62.25,66.75 R15.1
PWM_3_in: R18.1 R20_3.1 | length 6.9
  Top Layer w0.254: R20_3.1 63.75,63.75 R18.1
PWM_4_in: R19.1 U4.2 | length 15.8
  Top Layer w0.254: R19.1 65.25,66.75 66,66 67.5,66 69.25,67.75 73.25,67.75 76.69,64.31 U4.2
PWM_5_in: R40.1 U4.1 | length 12.7
  Top Layer w0.254: R40.1 68,67.5 69,68.5 73.5,68.5 76.42,65.58 U4.1
SCK: R.23 U6.7 U7.7 | length 38.1
  Top Layer w0.254: U6.7 81.675,78.675 v1(82.25,79.25) ; U7.7 81.675,88.425 82.25,89 v1(82.5,89)
  Bottom Layer w0.254: R.23 63.881,96.119 66.068,93.932 75.679,93.932 81.682,87.929 81.682,87.25 ; v1(82.25,79.25) 81.682,79.818 81.682,87.25 ; v1(82.5,89) 82.5,88.068 81.682,87.25
SCL_BUS: R10.2 R.5 U5.26 | length 41.2
  Top Layer w0.254: R10.2 64.422,85.828 U5.26 64.422,79.578 v1(64.5,79.5)
  Bottom Layer w0.254: R.5 41.021,96.479 44,93.5 54.5,93.5 63.787,84.213 63.787,80.213 v1(64.5,79.5)
SDA_BUS: R9.2 R.3 U5.27 | length 40.9
  Top Layer w0.254: v1(63,79.75) 63.772,80.522 U5.27 63.772,85.023 R9.2
  Bottom Layer w0.254: R.3 38.481,96.769 42.25,93 54.389,93 63.355,84.035 63.355,80.105 v1(63,79.75)
SO: R.21 U6.6 U7.6 | length 43.1
  Top Layer w0.254: v1(80,85.25) 80.25,85.5 82,85.5 82.325,85.825 U7.6 ; v1(82,75.75) 82.325,76.075 U6.6
  Bottom Layer w0.254: R.21 64.971,93.5 75.5,93.5 81.25,87.75 81.25,86.5 ; v1(80,85.25) 81.25,86.5 ; v1(82,75.75) 81.25,76.5 81.25,86.5
TempSens1: J1.1 R22.1 U6.3 | length 10.1
  Top Layer w0.254: R22.1@82.075,71.25 82.325,71.5 82.325,72.425 ; U6.3 82.325,72.425 ; J1.1 89.5,72 82.75,72 82.325,72.425
TempSens2: J2.1 R23.1 U7.3 | length 10.1
  Top Layer w0.254: R23.1 82.325,80.575 82.325,81.75 ; U7.3 82.325,81.75 ; J2.1 89.98,81.25 82.825,81.25 82.325,81.75
V_PWR: C2.2 C80.2 F1.1 J3.1 J4.1 J5.1 J6.1 J7.1 J8.1 J9.1 R2.2 tp-PWR_IN1.1 U4.10 | length 211.3
  Top Layer w0.61: C80.2 26.564,87.186 R2.2
  Top Layer w0.813: v1(87,54.25) 87,55.17 U4.10
  Top Layer w1.626: tp-PWR_IN1.1 15.25,91.79 J9.1 17.71,90.54 23,85.25 ; C2.2 23,81.25 ; C80.2 25,87.25 23,85.25 ; F1.1 24.85,79.4 23,81.25 ; 23,81.25 23,85.25
  Bottom Layer w1.626: J9.1 15.79,90.54 12.5,87.25 12.5,54.25 ; J6.1 J5.1 14.29,43.96 12.5,45.75 12.5,54.25 ; J7.1 37.9,44.5 34.5,44.5 ; J8.1 47.6,44.9 45.25,47.25 ; J4.1 55.73,45.02 53.5,47.25 ; J3.1 63.75,44 60.5,47.25 ; v1(87,54.25) 77,44.25 69.25,44.25 66.25,47.25 60.5,47.25 ; 12.5,54.25 16.25,50.5 22.5,50.5 29.5,43.5 33.5,43.5 34.5,44.5 ; 34.5,44.5 37.25,47.25 45.25,47.25 ; 45.25,47.25 53.5,47.25 ; 53.5,47.25 60.5,47.25
pads on no net: R.1 R.17 R.27 R.28 U2.4 U4.3 U4.4 U4.5 U4.6 U4.7 U4.8 U4.11 U4.12 U4.13 U4.14 U4.15 U4.16 U5.12 U5.13 U5.15 U5.16 U5.17 U5.18 U5.19 U5.20 U5.21 U5.22 U6.1 U7.1

## Polygon pours and split planes (outlines as drawn)
GND on Top Layer "GND_L01_P000" (solid, pour order 0): 11,105 93,105 93,40 11,40
GND on Bottom Layer "NONET_L-01_P-001" (solid, pour order 1): 11,105 93,105 93,40 11,40

## Silkscreen, mask and mechanical layers (free items; w line width, h text height)
Top Overlay:
  drawing of 6 lines, arcs and shapes, not listed
  text "5V" at 18.7,96 h0.76 r90
  text "12V" at 15.5,95.9 h0.76 r90
  text "3.3V" at 21.9,95.2 h0.76 r90
  text "PWR IN" at 14.1,94.1 h0.89
  text "1" at 35.895,93.908 h0.89 r90
  text "3" at 39.07,93.908 h0.89 r90
  text "5" at 41.61,93.908 h0.89 r90
  text "7" at 44.15,93.908 h0.89 r90
  text "9" at 46.69,93.908 h0.89 r90
  text "11" at 49.23,93.908 h0.89 r90
  text "13" at 51.77,93.908 h0.89 r90
  text "15" at 54.31,93.908 h0.89 r90
  text "17" at 56.85,93.908 h0.89 r90
  text "19" at 59.39,93.908 h0.89 r90
  text "21" at 61.93,93.908 h0.89 r90
  text "23" at 64.47,93.908 h0.89 r90
  text "25" at 67.01,93.908 h0.89 r90
  text "27" at 69.55,93.908 h0.89 r90
  text "29" at 72.09,93.908 h0.89 r90
  text "31" at 74.63,93.908 h0.89 r90
  text "33" at 77.17,93.908 h0.89 r90
  text "35" at 79.71,93.908 h0.89 r90
  text "37" at 82.25,93.908 h0.89 r90
  text "39" at 84.79,93.908 h0.89 r90
  text "LED ON" at 31.1,89.9 h0.89
  text "12V" at 12,89.5 h0.64 r90
  text "LED 3.3V" at 51.6,88.4 h0.89
  text "GND" at 12.1,84.6 h0.64 r90
  text "LED 5V" at 51.5,81.6 h0.89
  text "SENS T2" at 86,79.7 h0.89 r90
  text "SENS T1" at 86.1,70.7 h0.89 r90
  text "LabTecLibre" at 11.9,55.4 h3.81
  text "Mini FluOpti V1.0" at 12.1,53.3 h2.54
  text "HEATER1" at 12.2,50.8 h0.89
  text "HEATER 2" at 19.1,50.7 h0.89
  text "-" at 15.3,49.3 h0.89
  text "-" at 21.8,49.3 h0.89
  text "BLUE" at 47.3,48.3 h0.89
  text "RED" at 55.7,48.3 h0.89
  text "GREEN" at 62.8,48.3 h0.89
  text "WHITE" at 38.8,48 h0.89
  text "+" at 63.3,46.9 h0.89
  text "-" at 65.9,46.9 h0.89
  text "+" at 47.1,46.8 h0.89
  text "-" at 49.7,46.8 h0.89
  text "+" at 55.4,46.8 h0.89
  text "-" at 58,46.8 h0.89
  text "+" at 39.3,46.7 h0.89
  text "-" at 41.9,46.7 h0.89
  text "+" at 15.4,40.4 h0.89
  text "+" at 21.9,40.4 h0.89
Bottom Overlay:
  drawing of 7 lines, arcs and shapes, not listed
  text "LabTecLibre" at 67.8,83.7 h10.16
  text "Mini FluOpti V1.0" at 67.6,77 h6.35
Cutoff:
  the board outline again, w0.127